# Altium PCB Atom_Mate_Board.PcbDoc
Units mm, origin at the board's own origin, x right, y up, seen from the top; angles counter-clockwise.
Board outline 38.61 x 38.61 mm, 2 copper layers (Top Layer, Bottom Layer); 6 components, 9 nets, 52 pads, 165 vias.
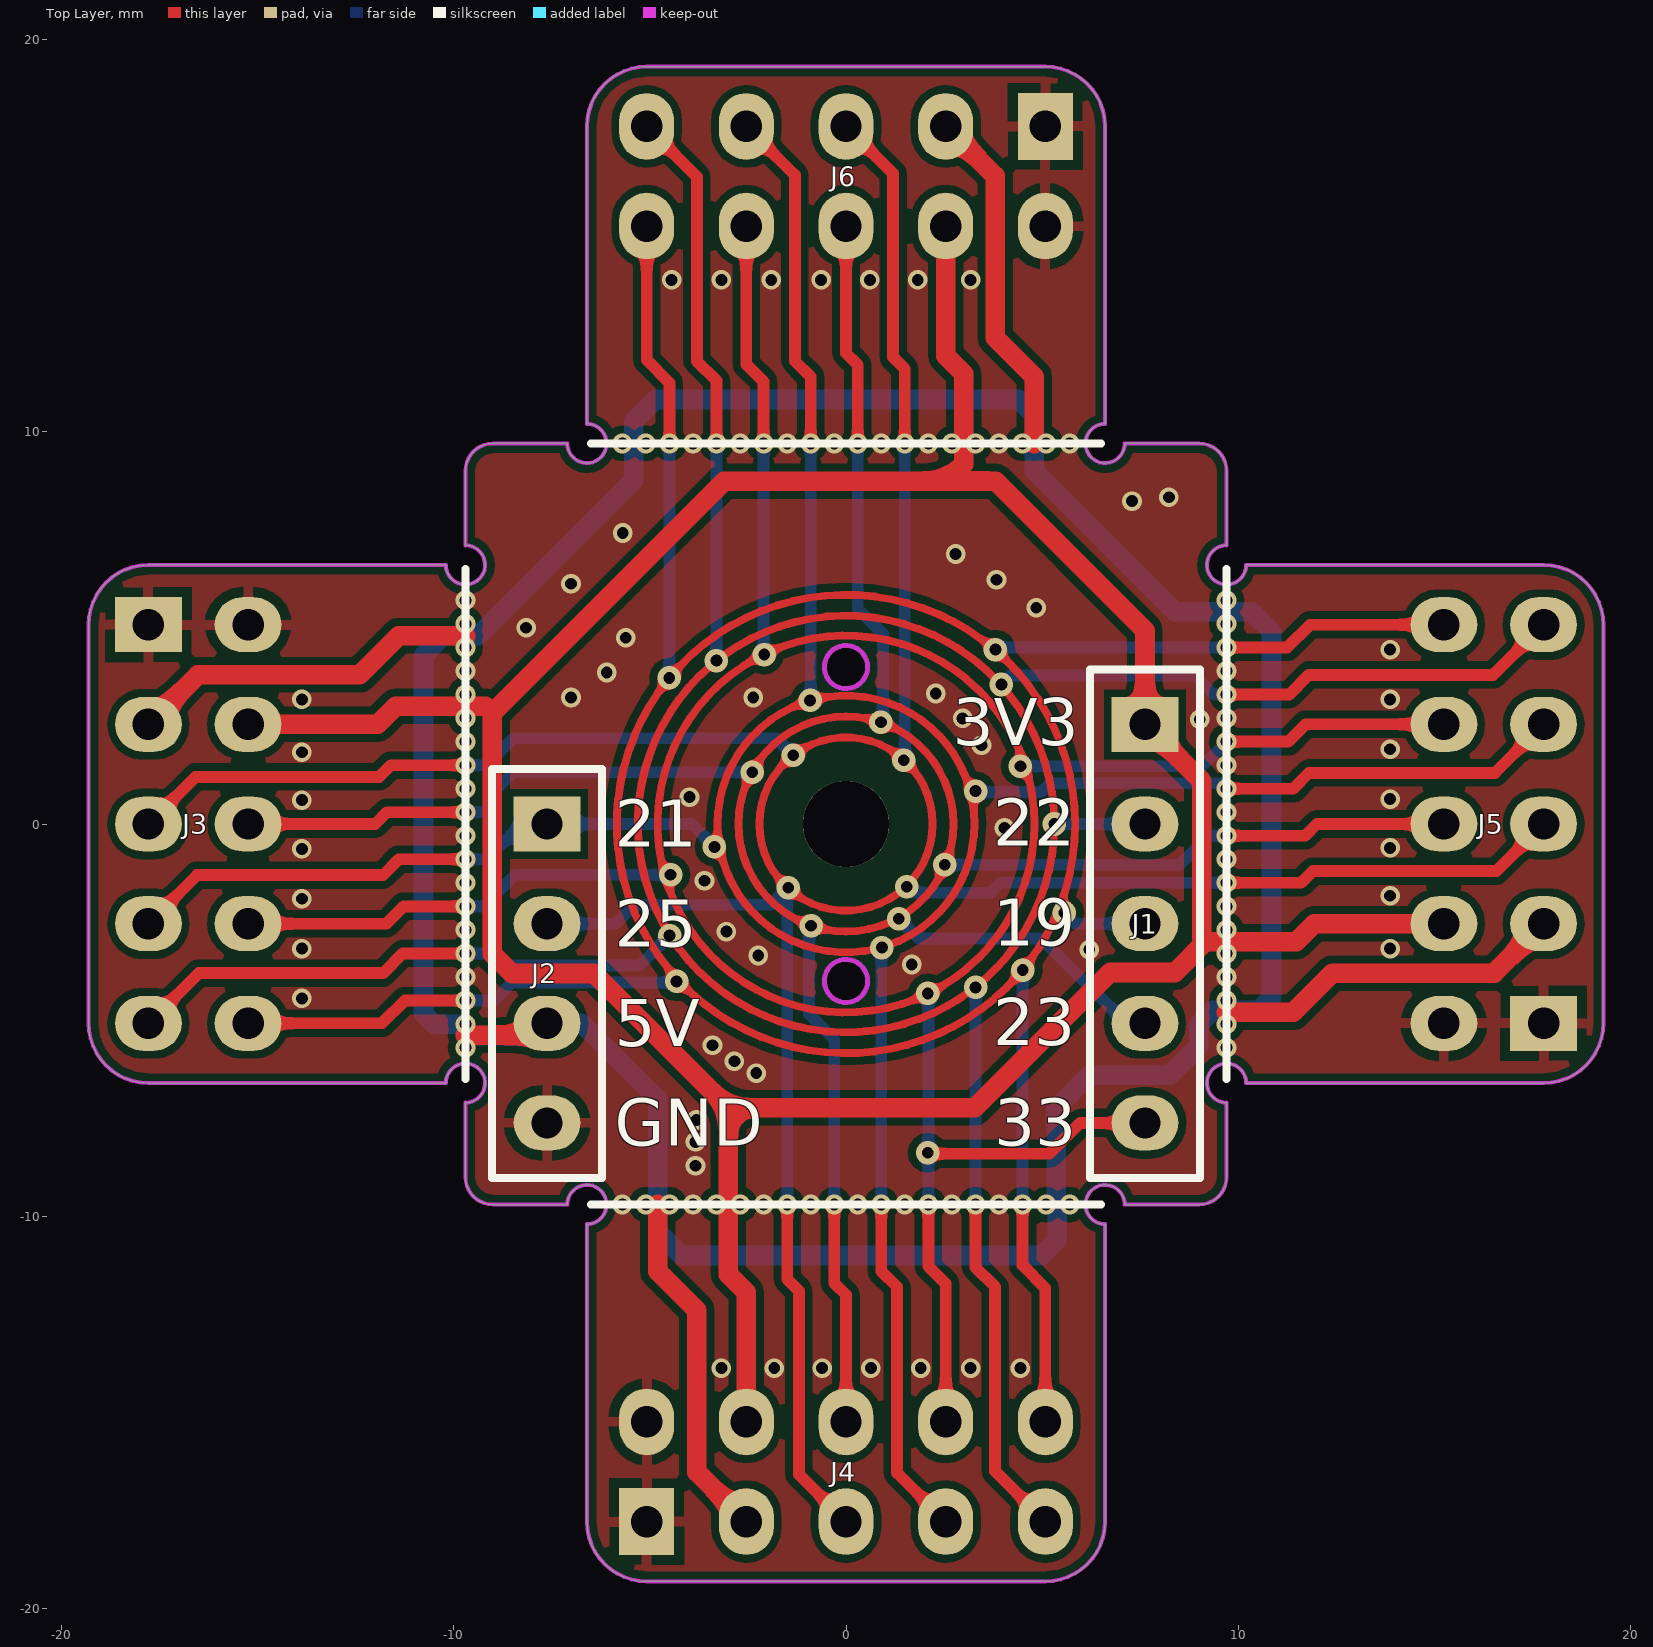
[diagram p0: Top Layer view]
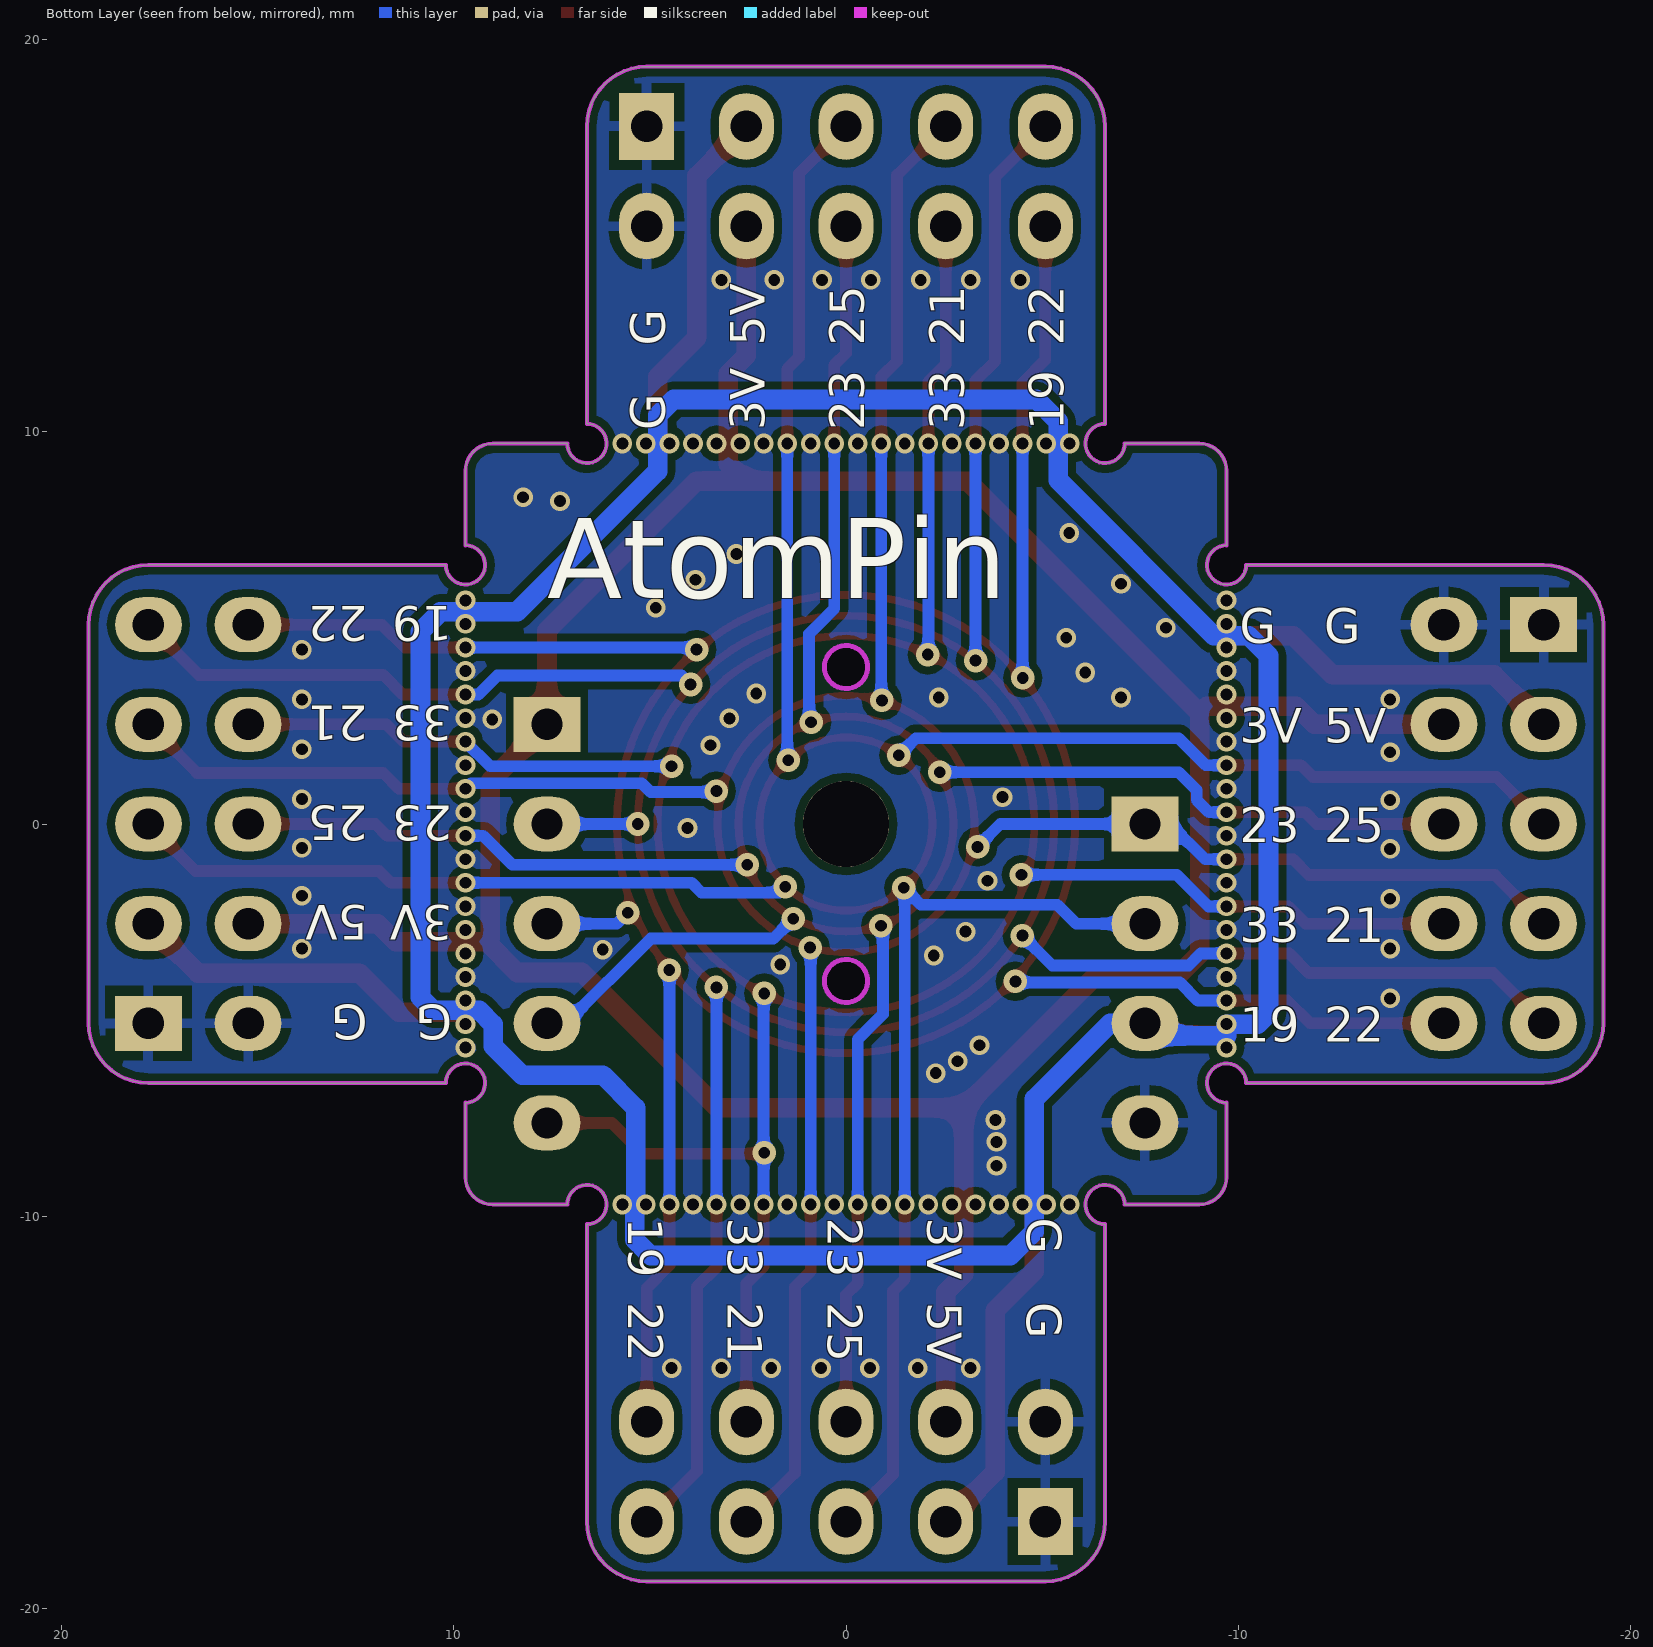
[diagram p1: Bottom Layer view, seen from below]

## Layer stack, top to bottom
Top Solder: solder mask 0.0102, Solder Resist, Dk 3.5
Top Layer: signal copper 0.0356
Dielectric 1: dielectric 0.32, FR-4, Dk 4.8
Bottom Layer: signal copper 0.0356
Bottom Solder: solder mask 0.0102, Solder Resist, Dk 3.5

## Board outline
-9.7,-9 -9.7,-7.104 ccw(c-9.7,-6.604) -10.2,-6.604 -17.78,-6.604 cw(c-17.78,-5.08) -19.304,-5.08 -19.304,5.08 cw(c-17.78,5.08) -17.78,6.604 -10.2,6.604 ccw(c-9.7,6.604) -9.7,7.104 -9.7,9 cw(c-9,9) -9,9.7 -7.104,9.7 ccw(c-6.604,9.7) -6.604,10.2 -6.604,17.78 cw(c-5.08,17.78) -5.08,19.304 5.08,19.304 cw(c5.08,17.78) 6.604,17.78 6.604,10.2 ccw(c6.604,9.7) 7.104,9.7 9,9.7 cw(c9,9) 9.7,9 9.7,7.104 ccw(c9.7,6.604) 10.2,6.604 17.78,6.604 cw(c17.78,5.08) 19.304,5.08 19.304,-5.08 cw(c17.78,-5.08) 17.78,-6.604 10.2,-6.604 ccw(c9.7,-6.604) 9.7,-7.104 9.7,-9 cw(c9,-9) 9,-9.7 7.104,-9.7 ccw(c6.604,-9.7) 6.604,-10.2 6.604,-17.78 cw(c5.08,-17.78) 5.08,-19.304 -5.08,-19.304 cw(c-5.08,-17.78) -6.604,-17.78 -6.604,-10.2 ccw(c-6.604,-9.7) -7.104,-9.7 -9,-9.7 cw(c-9,-9)
cut-out: -0.55,4 ccw(c0,4) 0,3.45 ccw(c0,4) 0.55,4 ccw(c0,4) 0,4.55 ccw(c0,4)
cut-out: -0.55,-4 ccw(c0,-4) 0,-4.55 ccw(c0,-4) 0.55,-4 ccw(c0,-4) 0,-3.45 ccw(c0,-4)

## Design rules (kind name [scope] priority, off if disabled: settings)
Clearance [All] p1: gap=0.2 ignorepadtopadclearanceinfootprint=FALSE
PolygonConnect [All] p1: thpad.connectstyle=Relief thpad.reliefconductorwidth=0.254 thpad.reliefentries=4 thpad.polygonreliefangle="90 Angle" thpad.airgapwidth=0.254 smdpad.connectstyle=Relief smdpad.reliefconductorwidth=0.254 smdpad.reliefentries=4 smdpad.polygonreliefangle="90 Angle" smdpad.airgapwidth=0.254 via.connectstyle=Direct via.reliefconductorwidth=0.254 via.reliefentries=4 via.polygonreliefangle="90 Angle" via.airgapwidth=0.254
RoomDefinition AtomPin [InComponentClass('AtomPin')] p1: confinementstyle=ConfineIn formatcopy=TRUE lockcomponents=FALSE outline -137.541,-96.647 -86.741,-96.647 -86.741,-71.247 -137.541,-71.247
RoutingVias [All] p1: holewidth=0.3 width=0.6 viastyle="Through Hole" minholewidth=0.3 minwidth=0.6 maxholewidth=0.3 maxwidth=0.6
SolderMaskExpansion [All] p1: expansion=0.102
Width [InNet('No Net')] p1: maxlimit=0.254 minlimit=0.254 preferedwidth=0.254
30 further rules are at their usual default settings.

## Components (designator, comment, footprint, x,y, rotation, side; value= is the part's Value field where it differs from the comment)
J1 "H254_1x5P" 1*5P254 7.62,2.54 r0 top locked
J2 "H254_1x4P" 1*4P254 -7.62,0 r0 top locked
J3 "H254_2x5P" 2*5P254 -17.78,5.08 r0 top locked
J4 "H254_2x5P" 2*5P254 -5.08,-17.78 r90 top locked
J5 "H254_2x5P" 2*5P254 17.78,-5.08 r180 top locked
J6 "H254_2x5P" 2*5P254 5.08,17.78 r270 top locked

## Footprints (in the part's own frame and the unit in brackets; to place one, negate y for a bottom-side part, rotate by r counter-clockwise, add the part's x,y. Pads: shape width x height; smd on the part's side, far side on the other; paste and mask are expansions set on the pad)
1*4P254 [mm]
  rect 1.7x1.4 hole 0.8: 1(0,0)
  oval 1.7x1.4 hole 0.8: 2(0,-2.54) 3(0,-5.08) 4(0,-7.62)
  silkscreen extent -1.4,-9.02 1.4,1.4
1*5P254 [mm]
  rect 1.7x1.4 hole 0.8: 1(0,0)
  oval 1.7x1.4 hole 0.8: 2(0,-2.54) 3(0,-5.08) 4(0,-7.62) 5(0,-10.16)
  silkscreen extent -1.4,-11.56 1.4,1.4
2*5P254 [mm]
  rect 1.7x1.4 hole 0.8: 1(0,0)
  oval 1.7x1.4 hole 0.8: 2(2.54,0) 3(0,-2.54) 4(2.54,-2.54) 5(0,-5.08) 6(2.54,-5.08) 7(0,-7.62) 8(2.54,-7.62) 9(0,-10.16) 10(2.54,-10.16)

## Part data
J1: "1*5P 2.54"
J2: "1*4P 2.54"
J3 J4 J5 J6: "2*5P 2.54"

## Free pads (board coordinates)
  round 3.9 on Bottom Solder: 35(0,0)
  round 3.9 on Top Solder: 35(0,0)
  round 2.2 hole 2.2: SCLG22(0,0)

## Via types
v1: diameter 0.5, hole 0.3, Top Layer to Bottom Layer, tented both sides, 137 vias
v2: diameter 0.6, hole 0.3, Top Layer to Bottom Layer, tented both sides, 28 vias

## Nets (pads, with @x,y where several pads share a name; then routed paths per layer and width w, separated by ;. In a path a pad name is that pad's centre, name@x,y a point inside that pad or via, vN(x,y) a via of type N, cw(c..) or ccw(c..) an arc to the next point about the centre after c; other vN are vias at no path point)
3V3: J1.1 J3.4 J4.4 J5.4 J6.4 | length 84.5
  Top Layer w0.5: J3.4 -11.938,2.54 -11.478,3 -9.195,3 ; J4.4 -2.54,-11.938 -3,-11.478 -3,-9.7 -3,-7.237 ; J6.4 2.54,11.938 3,11.478 3,9.172 2.565,8.738 ; J5.4 11.938,-2.54 11.478,-3 9.167,-3 ; -3,-7.237 3.279,-7.237 6.731,-3.785 8.382,-3.785 9.167,-3 ; -3,-7.237 -6.426,-3.81 -8.509,-3.81 -9.017,-3.302 -9.017,2.822 -3.101,8.738 2.565,8.738 ; 2.565,8.738 3.81,8.738 7.62,4.928 J1.1 9.068,1.092 9.068,-2.9 9.167,-3
  other v1: -3.3,-9.7 -2.7,-9.7 9.7,-3.3 9.7,-2.7 -9.7,2.7 -9.7,3.3 2.7,9.7 3.3,9.7
5V: J2.3 J3.3 J4.3 J5.3 J6.3 | length 116.5
  Top Layer w0.5: J3.3 -16.52,3.8 -12.4,3.8 -11.397,4.803 -9.7,4.803 ; -9.7,-5.385 -7.925,-5.385 J2.3 ; -4.803,-9.7 -4.803,-11.397 -3.8,-12.4 -3.8,-16.52 J4.3 ; J6.3 3.8,16.52 3.8,12.4 4.803,11.397 4.803,9.7 ; 9.7,-4.803 11.397,-4.803 12.4,-3.8 16.52,-3.8 J5.3
  Bottom Layer w0.5: J2.3@-7.925,-5.283 -8.042,-5.4 -9.7,-5.4 v1(-9.7,-5.1) -10.496,-5.1 -10.77,-4.826 -10.77,4.293 -10.262,4.801 -9.373,4.801 -5.41,8.763 -5.41,10.262 -4.851,10.82 4.394,10.82 4.801,10.414 4.801,8.992 8.382,5.41 10.338,5.41 10.846,4.902 10.846,-4.42 10.516,-4.75 9.347,-4.75 8.992,-5.105 8.992,-5.664 8.255,-6.401 6.198,-6.401 5.359,-7.239 5.359,-9.652 5.385,-9.677 5.385,-10.592 4.978,-10.998 -4.191,-10.998 -4.801,-10.389 -4.801,-7.01 -6.731,-5.08 J2.3
  other v1: -5.1,-9.7 -4.5,-9.7 5.1,-9.7 5.7,-9.7 -9.7,-5.7 9.7,-5.1 9.7,-4.5 -9.7,4.5 -9.7,5.1 9.7,5.1 9.7,5.7 -5.7,9.7 -5.1,9.7 4.5,9.7 5.1,9.7
G19: J1.3 J3.10 J4.10 J5.10 J6.10 | length 85.5
  Top Layer w0.2: 5.842,0 ccw(c0,0) 5.842,0
  Top Layer w0.3: J3.10 -11.829,-5.08 -11.249,-4.5 v1(-9.7,-4.5) v1@-9.72,-4.48 ; J6.10 -5.08,11.829 -4.5,11.249 v1(-4.5,9.7) ; v2(-4.502,3.723) v2@-4.5,3.725 ; v1@4.48,-9.72 v1(4.5,-9.7) 4.5,-11.249 5.08,-11.829 J4.10 ; v1@9.72,4.48 v1(9.7,4.5) 11.249,4.5 11.829,5.08 J5.10
  Bottom Layer w0.3: v1(-9.7,-4.5) -8.97,-4.5 -8.509,-4.039 -4.343,-4.039 v2(-4.318,-4.013) ; v2@-4.5,3.725 v1(-4.5,9.7) ; v2(3.81,4.445) 3.865,4.5 v1(9.7,4.5) ; v1(4.5,-9.7) v2@4.5,-3.725 ; v2(5.563,-2.261) 5.842,-2.54 J1.3
  other v2: 4.502,-3.723
G21: J2.1 J3.7 J4.7 J5.7 J6.7 | length 82.2
  Top Layer w0.2: 3.274,0 ccw(c0,0) 3.274,0
  Top Layer w0.3: J3.7 -16.54,-1.3 -11.8,-1.3 -11.4,-0.9 v1(-9.7,-0.9) ; J6.7 -1.3,16.54 -1.3,11.8 -0.9,11.4 v1(-0.9,9.7) ; v1(0.9,-9.7) 0.9,-11.4 1.3,-11.8 1.3,-16.54 J4.7 ; v1(9.7,0.9) 11.4,0.9 11.8,1.3 16.54,1.3 J5.7
  Bottom Layer w0.3: v1(-9.7,-0.9) -9.158,-0.9 -8.258,0 J2.1 -3.937,0 v2(-3.353,-0.584) ; v2(-0.914,3.15) -0.9,3.164 v1(-0.9,9.7) ; v1(0.9,-9.7) 0.9,-3.164 v2(0.914,-3.15) ; v2(3.302,0.838) 3.327,0.813 4.978,0.813 5.207,1.041 9.559,1.041 v1(9.7,0.9)
G22: J1.2 J3.9 J4.9 J5.9 J6.9 | length 93.7
  Top Layer w0.2: v2(5.309,0) ccw(c0,0) v2(5.309,0)
  Top Layer w0.3: J3.9 -16.5,-3.8 -11.8,-3.8 -11.3,-3.3 v1(-9.7,-3.3) ; J6.9 -3.8,16.5 -3.8,11.8 -3.3,11.3 v1(-3.3,9.7) ; v1(3.3,-9.7) 3.3,-11.3 3.8,-11.8 3.8,-16.5 J4.9 ; v1(9.7,3.3) 11.3,3.3 11.8,3.8 16.5,3.8 J5.9
  Bottom Layer w0.3: v1(-9.7,-3.3) -9.044,-3.3 -8.738,-3.607 -5.258,-3.607 v2(-4.496,-2.845) ; v2(-3.302,4.166) -3.3,4.168 v1(-3.3,9.7) ; v1(3.3,-9.7) 3.3,-4.168 v2(3.302,-4.166) ; v2(3.962,3.556) 4.191,3.785 8.89,3.785 9.375,3.3 v1(9.7,3.3) ; v2(5.309,0) J1.2
G23: J1.4 J3.6 J4.6 J5.6 J6.6 | length 77.4
  Top Layer w0.2: 2.74,0 ccw(c0,0) 2.74,0
  Top Layer w0.3: J3.6 -12,0 -11.7,0.3 v1(-9.7,0.3) ; v1(-0.3,-9.7) -0.3,-11.7 0,-12 J4.6 ; J6.6 0,12 0.3,11.7 v1(0.3,9.7) ; v1(9.7,-0.3) 11.7,-0.3 12,0 J5.6
  Bottom Layer w0.3: v1(-9.7,0.3) -9.25,0.3 -8.941,0.61 -8.941,0.864 -8.484,1.321 v2(-2.388,1.321) ; v2(-0.889,-2.591) -0.94,-2.642 -0.94,-4.851 -0.3,-5.491 v1(-0.3,-9.7) ; v1(0.3,9.7) 0.3,5.491 0.94,4.851 0.94,2.642 v2(0.889,2.591) ; v2(1.346,-2.413) 1.854,-2.921 4.978,-2.921 7.137,-5.08 J1.4 ; v2(2.515,-1.041) 8.509,-1.041 9.25,-0.3 v1(9.7,-0.3)
G25: J2.2 J3.5 J4.5 J5.5 J6.5 | length 88.5
  Top Layer w0.2: 2.207,0 ccw(c0,0) 2.207,0
  Top Layer w0.3: J3.5 -16.58,1.2 -11.9,1.2 -11.6,1.5 v1(-9.7,1.5) ; v1(-1.5,-9.7) -1.5,-11.6 -1.2,-11.9 -1.2,-16.58 J4.5 ; J6.5 1.2,16.58 1.2,11.9 1.5,11.6 v1(1.5,9.7) ; v1(9.7,-1.5) 11.6,-1.5 11.9,-1.2 16.58,-1.2 J5.5
  Bottom Layer w0.3: v1(-9.7,1.5) -9.168,1.5 -8.484,2.184 -1.778,2.184 v2(-1.346,1.753) ; J2.2 -5.867,-2.54 -5.385,-2.057 -1.905,-2.057 v2@-1.5,-1.652 ; v1(-1.5,-9.7) v2@-1.5,-1.652 ; v2(-1.473,-1.626) v2@-1.5,-1.652 ; v2(1.473,1.626) 1.5,1.652 v1(1.5,9.7) ; v2(1.549,-1.6) 1.702,-1.753 3.683,-1.753 3.936,-1.5 v1(9.7,-1.5)
G33: J1.5 J3.8 J4.8 J5.8 J6.8 | length 80.8
  Top Layer w0.2: 4.803,0 ccw(c0,0) 4.803,0
  Top Layer w0.3: J3.8 -11.715,-2.54 -11.275,-2.1 v1(-9.7,-2.1) ; J6.8 -2.54,11.715 -2.1,11.275 v1(-2.1,9.7) ; v2(2.083,-8.382) 2.108,-8.407 5.182,-8.407 5.969,-7.62 J1.5 ; v1(2.1,-9.7) 2.1,-11.275 2.54,-11.715 J4.8 ; v1(9.7,2.1) 11.275,2.1 11.715,2.54 J5.8
  Bottom Layer w0.3: v1(-9.7,-2.1) -9.237,-2.1 -8.433,-1.295 v2(-4.47,-1.295) ; v1(-2.1,9.7) -2.1,4.335 v2(-2.083,4.318) ; v2(2.083,-4.318) 2.1,-4.335 2.1,-8.382 v1(2.1,-9.7) ; v2(4.445,1.473) 9.073,1.473 v1(9.7,2.1)
GND: J2.4 J3.1 J3.2 J4.1 J4.2 J5.1 J5.2 J6.1 J6.2
  other v1: -3.175,-13.868 -1.829,-13.868 -0.61,-13.868 0.635,-13.868 1.905,-13.868 3.175,-13.868 4.445,-13.868 -5.7,-9.7 -3.9,-9.7 -2.1,-9.7 -0.9,-9.7 0.3,-9.7 1.5,-9.7 2.7,-9.7 3.9,-9.7 -3.835,-8.712 -3.835,-8.103 -3.81,-7.544 -2.286,-6.35 -2.845,-6.045 9.7,-5.7 -3.404,-5.639 -13.868,-4.445 -9.7,-3.9 9.7,-3.9 1.676,-3.581 -2.235,-3.353 6.198,-3.2 -13.868,-3.175 13.868,-3.175 -3.048,-2.743 -9.7,-2.7 9.7,-2.1 -13.868,-1.905 13.868,-1.829 -9.7,-1.5 -3.607,-1.448 9.7,-0.9 -13.868,-0.635 13.868,-0.61 -9.7,-0.3 4.039,-0.102 9.7,0.3 -13.868,0.61 13.868,0.635 -3.988,0.686 -9.7,0.9 9.7,1.5 -13.868,1.829 13.868,1.905 3.454,2.007 -9.7,2.1 9.017,2.667 2.972,2.692 9.7,2.7 -13.868,3.175 13.868,3.175 -7.01,3.226 -2.362,3.226 2.286,3.327 -6.096,3.861 -9.7,3.9 9.7,3.9 13.868,4.445 -5.613,4.75 -8.153,5.004 4.851,5.512 -9.7,5.7 -7.01,6.121 3.835,6.223 2.794,6.883 -5.69,7.417 7.29,8.23 8.23,8.331 -3.9,9.7 -2.7,9.7 -1.5,9.7 -0.3,9.7 0.9,9.7 2.1,9.7 3.9,9.7 5.7,9.7 -4.445,13.868 -3.175,13.868 -1.905,13.868 -0.635,13.868 0.61,13.868 1.829,13.868 3.175,13.868

## Polygon pours and split planes (outlines as drawn)
GND on Top Layer "Top Layer-No Net" (solid, remove dead copper, pour order 0): -10.2,-6.604 -17.78,-6.604 cw(c-17.78,-5.08) -19.304,-5.08 -19.304,5.08 cw(c-17.78,5.08) -17.78,6.604 -10.2,6.604 ccw(c-9.692,6.604) -9.692,6.096 -9.652,6.096 ccw(c-9.652,6.528) -9.22,6.528 -9.22,6.624 ccw(c-9.7,6.624) -9.7,7.104 -9.7,9 cw(c-9,9) -9,9.7 -7.104,9.7 -7.104,9.695 ccw(c-6.604,9.695) -6.604,9.195 ccw(c-6.604,9.677) -6.121,9.677 -6.121,9.717 ccw(c-6.604,9.717) -6.604,10.2 -6.604,17.78 cw(c-5.08,17.78) -5.08,19.304 5.08,19.304 cw(c5.08,17.78) 6.604,17.78 6.604,10.2 ccw(c6.604,9.717) 6.121,9.717 6.121,9.677 ccw(c6.579,9.677) 6.579,9.22 6.624,9.22 ccw(c6.624,9.7) 7.104,9.7 9,9.7 cw(c9,9) 9.7,9 9.7,7.104 9.695,7.104 ccw(c9.695,6.604) 9.195,6.604 ccw(c9.677,6.604) 9.677,6.121 9.717,6.121 ccw(c9.717,6.604) 10.2,6.604 17.78,6.604 cw(c17.78,5.08) 19.304,5.08 19.304,-5.08 cw(c17.78,-5.08) 17.78,-6.604 10.2,-6.604 ccw(c9.717,-6.604) 9.717,-6.121 9.677,-6.121 ccw(c9.677,-6.604) 9.195,-6.604 9.195,-6.629 ccw(c9.669,-6.629) 9.669,-7.104 9.7,-7.104 9.7,-9 cw(c9,-9) 9,-9.7 7.104,-9.7 ccw(c6.624,-9.7) 6.624,-9.22 6.579,-9.22 ccw(c6.579,-9.703) 6.096,-9.703 ccw(c6.593,-9.703) 6.593,-10.2 6.604,-10.2 6.604,-17.78 cw(c5.08,-17.78) 5.08,-19.304 -5.08,-19.304 cw(c-5.08,-17.78) -6.604,-17.78 -6.604,-10.2 ccw(c-6.604,-9.717) -6.121,-9.717 -6.121,-9.677 ccw(c-6.579,-9.677) -6.579,-9.22 -6.624,-9.22 ccw(c-6.624,-9.7) -7.104,-9.7 -9,-9.7 cw(c-9,-9) -9.7,-9 -9.7,-7.104 ccw(c-9.7,-6.624) -9.22,-6.624 -9.22,-6.604 ccw(c-9.703,-6.604) -9.703,-6.121 -9.717,-6.121 ccw(c-9.717,-6.604)
GND on Bottom Layer "Top Layer-No Net" (solid, remove dead copper, pour order 2): -10.2,-6.604 -17.78,-6.604 cw(c-17.78,-5.08) -19.304,-5.08 -19.304,5.08 cw(c-17.78,5.08) -17.78,6.604 -10.2,6.604 ccw(c-9.692,6.604) -9.692,6.096 -9.652,6.096 ccw(c-9.652,6.528) -9.22,6.528 -9.22,6.624 ccw(c-9.7,6.624) -9.7,7.104 -9.7,9 cw(c-9,9) -9,9.7 -7.104,9.7 -7.104,9.695 ccw(c-6.604,9.695) -6.604,9.195 ccw(c-6.604,9.677) -6.121,9.677 -6.121,9.717 ccw(c-6.604,9.717) -6.604,10.2 -6.604,17.78 cw(c-5.08,17.78) -5.08,19.304 5.08,19.304 cw(c5.08,17.78) 6.604,17.78 6.604,10.2 ccw(c6.604,9.717) 6.121,9.717 6.121,9.677 ccw(c6.579,9.677) 6.579,9.22 6.624,9.22 ccw(c6.624,9.7) 7.104,9.7 9,9.7 cw(c9,9) 9.7,9 9.7,7.104 9.695,7.104 ccw(c9.695,6.604) 9.195,6.604 ccw(c9.677,6.604) 9.677,6.121 9.717,6.121 ccw(c9.717,6.604) 10.2,6.604 17.78,6.604 cw(c17.78,5.08) 19.304,5.08 19.304,-5.08 cw(c17.78,-5.08) 17.78,-6.604 10.2,-6.604 ccw(c9.717,-6.604) 9.717,-6.121 9.677,-6.121 ccw(c9.677,-6.604) 9.195,-6.604 9.195,-6.629 ccw(c9.669,-6.629) 9.669,-7.104 9.7,-7.104 9.7,-9 cw(c9,-9) 9,-9.7 7.104,-9.7 ccw(c6.624,-9.7) 6.624,-9.22 6.579,-9.22 ccw(c6.579,-9.703) 6.096,-9.703 ccw(c6.593,-9.703) 6.593,-10.2 6.604,-10.2 6.604,-17.78 cw(c5.08,-17.78) 5.08,-19.304 -5.08,-19.304 cw(c-5.08,-17.78) -6.604,-17.78 -6.604,-10.2 ccw(c-6.604,-9.717) -6.121,-9.717 -6.121,-9.677 ccw(c-6.579,-9.677) -6.579,-9.22 -6.624,-9.22 ccw(c-6.624,-9.7) -7.104,-9.7 -9,-9.7 cw(c-9,-9) -9.7,-9 -9.7,-7.104 ccw(c-9.7,-6.624) -9.22,-6.624 -9.22,-6.604 ccw(c-9.703,-6.604) -9.703,-6.121 -9.717,-6.121 ccw(c-9.717,-6.604)

## Keep-outs
Keep-Out Layer:
  circle w0.127: c0,4 r0.55
  circle w0.127: c0,-4 r0.55
  lines w0.1: -19.304,-5.08 ccw(c-17.78,-5.08) -17.78,-6.604 -10.2,-6.604 cw(c-9.7,-6.604) -9.7,-7.104 -9.7,-9 ccw(c-9,-9) -9,-9.7 -7.104,-9.7 cw(c-6.604,-9.7) -6.604,-10.2 -6.604,-17.78 ccw(c-5.08,-17.78) -5.08,-19.304 5.08,-19.304 ccw(c5.08,-17.78) 6.604,-17.78 6.604,-10.2 cw(c6.604,-9.7) 7.104,-9.7 9,-9.7 ccw(c9,-9) 9.7,-9 9.7,-7.104 cw(c9.7,-6.604) 10.2,-6.604 17.78,-6.604 ccw(c17.78,-5.08) 19.304,-5.08 19.304,5.08 ccw(c17.78,5.08) 17.78,6.604 10.2,6.604 cw(c9.7,6.604) 9.7,7.104 9.7,9 ccw(c9,9) 9,9.7 7.104,9.7 cw(c6.604,9.7) 6.604,10.2 6.604,17.78 ccw(c5.08,17.78) 5.08,19.304 -5.08,19.304 ccw(c-5.08,17.78) -6.604,17.78 -6.604,10.2 cw(c-6.604,9.7) -7.104,9.7 -9,9.7 ccw(c-9,9) -9.7,9 -9.7,7.104 cw(c-9.7,6.604) -10.2,6.604 -17.78,6.604 ccw(c-17.78,5.08) -19.304,5.08 -19.304,-5.08

## Silkscreen, mask and mechanical layers (free items; w line width, h text height)
Top Overlay:
  lines w0.2: -9.7,-6.5 -9.7,6.5 ; -6.5,-9.7 6.5,-9.7 ; -6.5,9.7 6.5,9.7 ; 9.7,-6.5 9.7,6.5
  text "3V3" at 2.718,2.007 h1.2
  text "22" at 3.759,-0.559 h1.2
  text "21" at -5.893,-0.584 h1.2
  text "19" at 3.759,-3.099 h1.2
  text "25" at -5.893,-3.124 h1.2
  text "23" at 3.759,-5.639 h1.2
  text "5V" at -5.893,-5.664 h1.2
  text "GND" at -5.893,-8.204 h1.2
  text "33" at 3.785,-8.204 h1.2
Bottom Overlay:
  text "22" at -5.842,12.192 h1.5 r270
  text "21" at -3.302,12.192 h1.5 r270
  text "25" at -0.762,12.192 h1.5 r270
  text "5V" at 1.778,12.192 h1.5 r270
  text "G" at 4.318,12.192 h1.5 r270
  text "19" at -5.842,10.033 h1.5 r270
  text "33" at -3.302,10.033 h1.5 r270
  text "23" at -0.762,10.033 h1.5 r270
  text "3V" at 1.778,10.033 h1.5 r270
  text "G" at 4.318,10.033 h1.5 r270
  text "19" at 10.033,5.842 h1.5 r180
  text "22" at 12.192,5.842 h1.5 r180
  text "AtomPin" at 7.62,5.08 h3.5
  text "G" at -12.192,4.318 h1.5
  text "G" at -10.033,4.318 h1.5
  text "33" at 10.033,3.302 h1.5 r180
  text "21" at 12.192,3.302 h1.5 r180
  text "5V" at -12.192,1.778 h1.5
  text "3V" at -10.033,1.778 h1.5
  text "23" at 10.033,0.762 h1.5 r180
  text "25" at 12.192,0.762 h1.5 r180
  text "25" at -12.192,-0.762 h1.5
  text "23" at -10.033,-0.762 h1.5
  text "3V" at 10.033,-1.778 h1.5 r180
  text "5V" at 12.192,-1.778 h1.5 r180
  text "21" at -12.192,-3.302 h1.5
  text "33" at -10.033,-3.302 h1.5
  text "G" at 10.033,-4.318 h1.5 r180
  text "G" at 12.192,-4.318 h1.5 r180
  text "22" at -12.192,-5.842 h1.5
  text "19" at -10.033,-5.842 h1.5
  text "G" at -4.318,-10.033 h1.5 r90
  text "3V" at -1.778,-10.033 h1.5 r90
  text "23" at 0.762,-10.033 h1.5 r90
  text "33" at 3.302,-10.033 h1.5 r90
  text "19" at 5.842,-10.033 h1.5 r90
  text "G" at -4.318,-12.192 h1.5 r90
  text "5V" at -1.778,-12.192 h1.5 r90
  text "25" at 0.762,-12.192 h1.5 r90
  text "21" at 3.302,-12.192 h1.5 r90
  text "22" at 5.842,-12.192 h1.5 r90
Mechanical 1:
  circle w0.127: c0,-4 r0.55
  circle w0.127: c0,4 r0.55
  lines w0.1: -19.304,-5.08 ccw(c-17.78,-5.08) -17.78,-6.604 -10.2,-6.604 cw(c-9.7,-6.604) -9.7,-7.104 -9.7,-9 ccw(c-9,-9) -9,-9.7 -7.104,-9.7 cw(c-6.604,-9.7) -6.604,-10.2 -6.604,-17.78 ccw(c-5.08,-17.78) -5.08,-19.304 5.08,-19.304 ccw(c5.08,-17.78) 6.604,-17.78 6.604,-10.2 cw(c6.604,-9.7) 7.104,-9.7 9,-9.7 ccw(c9,-9) 9.7,-9 9.7,-7.104 cw(c9.7,-6.604) 10.2,-6.604 17.78,-6.604 ccw(c17.78,-5.08) 19.304,-5.08 19.304,5.08 ccw(c17.78,5.08) 17.78,6.604 10.2,6.604 cw(c9.7,6.604) 9.7,7.104 9.7,9 ccw(c9,9) 9,9.7 7.104,9.7 cw(c6.604,9.7) 6.604,10.2 6.604,17.78 ccw(c5.08,17.78) 5.08,19.304 -5.08,19.304 ccw(c-5.08,17.78) -6.604,17.78 -6.604,10.2 cw(c-6.604,9.7) -7.104,9.7 -9,9.7 ccw(c-9,9) -9.7,9 -9.7,7.104 cw(c-9.7,6.604) -10.2,6.604 -17.78,6.604 ccw(c-17.78,5.08) -19.304,5.08 -19.304,-5.08